# EAGLE board Shutdown_2019_v1.0 (EAGLE 9.1.2)

Size 88.9 x 76.2 mm. Coordinates in mm from the lower left corner, seen from the top.
Outline: 0,0 88.9,0 88.9,76.2 0,76.2 0,0
Copper layers (1*16): Top 0.035mm / dielectric 1.6mm / Bottom 0.035mm
Design rules "Elecrow_2-layer_PCB_eagle_rule": minimum track width 6mil, minimum drill 12mil, track to track 6mil, track to pad 6mil, pad to pad 6mil, via to via 8mil, smd to smd 0mil, copper to edge 20mil, drill to drill 10mil, minimum pad ring 6mil, minimum via ring 6mil, stop-mask expansion 0mil, vias tented up to drill 100mil, thermal gap 10mil
Net classes: 0 default: width 0.254 mm; 1 PWR: width 0.406 mm; 2 AIR: width 1.27 mm; 3 PWR_IN: width 0.914 mm

## Footprints (pad centres in the part's own frame; a part is rotated, then mirrored left to right if it is on the bottom)
PV36 = drill 0.6: A -2.54,0; B 2.54,0; W 0,0
TP09R = smd 0.9 x 0.9: TP 0,0
C0603 = smd 1.1 x 1: 1 -0.85,0; 2 0.85,0
C0805 = smd 1.3 x 1.5: 1 -0.95,0; 2 0.95,0
E2,5-7 = drill 0.813 pad 1.6: + -1.27,0 | drill 0.813 pad 1.6 octagon: - 1.27,0
MINIFIT_JR_5566-02 = drill 1.9: 1 0,2.25; 2 0,-2.25
LED-0603 = smd 1 x 1: A 0,-0.877; C 0,0.877
SOD323-F = smd 0.8 x 0.6: A 1.25,0; C -1.25,0
SOT23 = smd 1 x 1.4: 1 -0.95,-1.1; 2 0.95,-1.1; 3 0,1.1
3568 = drill 1.6 long: P$1 -4.96,1.7; P$2 4.96,1.7; P$3 4.96,-1.7; P$4 -4.96,-1.7
3,0-PAD = drill 3 pad 5.842: B3,0 0,0
MINIFIT_JR_5566-04 = drill 1.9: 1 -2.1,2.25; 2 2.1,2.25; 3 -2.1,-2.25; 4 2.1,-2.25
1X05 = drill 1.016 long: 1 -5.08,0; 2 -2.54,0; 3 0,0; 4 2.54,0; 5 5.08,0
INDUCTOR_5X5MM_NR5040_NOTHERMALS = smd 1.8 x 4: P$1 -1.8,0; P$2 1.8,0
R0603 = smd 1 x 1.1: 1 -0.85,0; 2 0.85,0
QFP50P900X900X160-48N = smd 1.473 x 0.279: 1 -4.216,2.743; 2 -4.216,2.261; 3 -4.216,1.753; 4 -4.216,1.245; 5 -4.216,0.762; 6 -4.216,0.254; 7 -4.216,-0.254; 8 -4.216,-0.762; 9 -4.216,-1.245; 10 -4.216,-1.753; 11 -4.216,-2.261; 12 -4.216,-2.743; 25 4.216,-2.743; 26 4.216,-2.261; 27 4.216,-1.753; 28 4.216,-1.245; 29 4.216,-0.762; 30 4.216,-0.254; 31 4.216,0.254; 32 4.216,0.762; 33 4.216,1.245; 34 4.216,1.753; 35 4.216,2.261; 36 4.216,2.743 | smd 0.279 x 1.473: 13 -2.743,-4.216; 14 -2.261,-4.216; 15 -1.753,-4.216; 16 -1.245,-4.216; 17 -0.762,-4.216; 18 -0.254,-4.216; 19 0.254,-4.216; 20 0.762,-4.216; 21 1.245,-4.216; 22 1.753,-4.216; 23 2.261,-4.216; 24 2.743,-4.216; 37 2.743,4.216; 38 2.261,4.216; 39 1.753,4.216; 40 1.245,4.216; 41 0.762,4.216; 42 0.254,4.216; 43 -0.254,4.216; 44 -0.762,4.216; 45 -1.245,4.216; 46 -1.753,4.216; 47 -2.261,4.216; 48 -2.743,4.216
SOT23-3 = smd 0.8 x 0.9: 1 -0.95,-1; 2 0.95,-1; 3 0,1.1
SOT23-5 = smd 0.55 x 1.2: 1 -0.95,-1.3; 2 0,-1.3; 3 0.95,-1.3; 4 0.95,1.3; 5 -0.95,1.3
SOT223 = smd 1.219 x 2.235: 1 -2.311,-3.099; 2 0,-3.099; 3 2.311,-3.099 | smd 3.6 x 2.2: 4 0,3.099
SOIC8 = smd 0.6 x 1.5: 1 -1.905,-2.75; 2 -0.635,-2.75; 3 0.635,-2.75; 4 1.905,-2.75; 5 1.905,2.75; 6 0.635,2.75; 7 -0.635,2.75; 8 -1.905,2.75
SOT23-6 = smd 0.55 x 1.2: 1 -0.95,-1.3; 2 0,-1.3; 3 0.95,-1.3; 4 0.95,1.3; 5 0,1.3; 6 -0.95,1.3
DPDT_2.54 = drill 0.6: $P1 -6.35,2.54; $P3 -1.27,2.54; $P4 1.27,2.54; $P5 3.81,2.54; $P8 3.81,-2.54; $P9 1.27,-2.54; $P10 -1.27,-2.54; $P12 -6.35,-2.54
SOD-123 = smd 0.9 x 0.95: A 1.575,0; C -1.575,0

## Placement (x,y rotation side)
BRAKE  PV36  [PV36]  5.33,19.81 180 top
BTH1  TPTP09R  [TP09R]  1.02,13.72 270 top
C1  0.1u  [C0603]  8.89,36.58 270 top
C2  10uF  [C0805]  18.03,57.4 270 top
C3  3u  [C0603]  10.16,41.91 0 top
C4  3u  [C0603]  5.84,41.91 0 top
C5  0.1u  [C0603]  34.29,57.15 90 bottom
C6  0.1u  [C0603]  24.13,57.15 90 bottom
C7  0.1u  [C0603]  13.97,57.15 90 bottom
C8  10uF  [C0805]  28.19,57.4 270 top
C9  10uF  [C0805]  39.37,57.15 270 top
C10  220u  [E2,5-7]  73.66,60.96 90 top
C11  2.2u  [C0805]  63.5,52.07 0 top
C12  4.7u  [C0805]  68.58,45.72 90 top
C13  4.7u  [C0805]  78.74,45.72 90 top
C14  2.2u  [C0805]  68.58,52.07 180 top
C15  1u  [C0805]  60.2,29.97 90 bottom
C16  1u  [C0805]  28.96,29.46 180 bottom
C17  560p  [C0603]  72.39,2.54 90 top
C18  560p  [C0603]  72.39,10.16 270 top
C19  1u  [C0805]  62.23,29.97 270 bottom
C20  1u  [C0805]  28.96,31.5 0 bottom
C21  [C0603]  44.45,9.91 180 top
C22  0.1u  [C0805]  43.69,61.47 90 top
C23  0.1u  [C0805]  25.4,52.58 0 top
C24  0.1u  [C0603]  3.05,37.08 270 top
C25  0.01u  [C0603]  7.11,32.51 90 top
C26  0.1u  [C0805]  35.56,52.58 0 top
C27  0.1u  [C0603]  13.46,41.66 270 top
C28  0.1u  [C0603]  19.3,41.66 270 top
C29  0.1u  [C0805]  37.34,16 0 top
C30  0.1u  [C0805]  47.24,16 0 top
C31  0.001u  [C0805]  17.53,28.45 180 top
C32  0.1u  [C0805]  56.13,14.99 0 top
C33  0.001u  [C0805]  21.59,18.29 0 top
C34  0.001u  [C0805]  15.49,18.29 0 top
C35  0.001u  [C0805]  24.38,9.91 0 top
C36  0.001u  [C0805]  30.73,9.91 0 top
C37  0.1u  [C0603]  33.78,19.56 270 top
C38  0.1u  [C0603]  43.69,19.56 270 top
C39  0.1u  [C0603]  21.34,27.94 180 top
CAN  MINIFIT_JR_5566-02  [MINIFIT_JR_5566-02]  64.77,5.08 0 top
CURR  PV36  [PV36]  5.33,25.15 180 top
CURRENT_SENSOR_SUPPLY  MINIFIT_JR_5566-02  [MINIFIT_JR_5566-02]  83.82,32.51 90 top
D1  BLUE  [LED-0603]  35.56,55.88 270 top
D2  1N914  [SOD323-F]  20.57,62.23 270 bottom
D4  BLUE  [LED-0603]  25.4,56.64 270 top
D7  BLUE  [LED-0603]  15.24,56.64 270 top
D8  PESD1  [SOT23]  73.66,6.35 270 top
D9  1N914  [SOD323-F]  30.73,62.48 270 bottom
D10  RED  [LED-0603]  56.9,36.32 180 top
D11  GREEN  [LED-0603]  63.5,54.1 270 top
D12  GREEN  [LED-0603]  68.58,54.1 90 top
D13  RED  [LED-0603]  28.45,14.48 180 top
D15  1N914  [SOD323-F]  40.89,62.23 270 bottom
FUSE  MINI297-3568  [3568]  85.09,48.26 270 top
H1  MOUNT-PAD-ROUND3.0  [3,0-PAD]  83.82,71.12 0 top
H2  MOUNT-PAD-ROUND3.0  [3,0-PAD]  83.82,5.08 0 top
H3  MOUNT-PAD-ROUND3.0  [3,0-PAD]  5.08,5.08 0 top
H4  MOUNT-PAD-ROUND3.0  [3,0-PAD]  5.08,71.12 0 top
HALL_SENSE  MINIFIT_JR_5566-04  [MINIFIT_JR_5566-04]  15.24,5.08 0 top
JP1  [1X05]  69.85,31.75 270 top
JP2  [1X05]  33.02,38.35 0 top
L4  10u  [INDUCTOR_5X5MM_NR5040_NOTHERMALS]  74.68,53.85 180 top
PWR  MINIFIT_JR_5566-02  [MINIFIT_JR_5566-02]  83.82,62.23 90 top
Q1  DMN6140L-7  [SOT23]  19.3,53.34 180 bottom
Q2  DMN6140L-7  [SOT23]  29.46,53.34 180 bottom
Q3  DMN6140L-7  [SOT23]  25.4,53.34 90 bottom
Q4  DMN6140L-7  [SOT23]  86.36,15.24 0 top
Q5  DMN6140L-7  [SOT23]  15.24,53.34 90 bottom
Q6  DMP3099L-7  [SOT23]  16.51,62.23 180 bottom
Q7  DMN6140L-7  [SOT23]  56.13,18.29 0 top
Q9  DMN6140L-7  [SOT23]  39.62,53.34 180 bottom
Q10  DMN6140L-7  [SOT23]  52.58,63.75 0 top
Q11  DMP3099L-7  [SOT23]  26.67,62.23 180 bottom
Q12  IRLML6346PBF  [SOT23]  13.21,53.09 90 top
Q13  IRLML6346PBF  [SOT23]  13.21,49.02 90 top
Q14  IRLML6346PBF  [SOT23]  18.29,53.09 90 top
Q15  DMP3099L-7  [SOT23]  36.83,62.23 180 bottom
Q16  DMN6140L-7  [SOT23]  35.56,53.34 90 bottom
Q17  IRLML6346PBF  [SOT23]  18.29,49.02 90 top
Q18  DMN6140L-7  [SOT23]  64.26,72.39 90 top
Q20  DMN6140L-7  [SOT23]  59.94,72.39 90 top
Q21  DMN6140L-7  [SOT23]  68.58,72.39 90 top
R1  100k  [R0603]  10.16,39.88 180 top
R2  [R0603]  63.5,56.13 180 top
R3  3.6k  [R0603]  76.2,19.05 0 top
R4  [R0603]  68.58,56.13 180 top
R5  10k  [R0603]  17.78,45.97 0 top
R6  3.6k  [R0603]  76.2,25.4 0 top
R7  50k  [R0603]  41.15,7.11 90 top
R8  10k  [R0603]  3.05,33.53 90 top
R9  1k  [R0603]  81.28,16.51 0 top
R11  1k  [R0603]  21.59,37.85 90 top
R12  10k  [R0603]  19.81,50.29 0 bottom
R13  10k  [R0603]  29.97,50.29 180 bottom
R14  10k  [R0603]  40.13,50.29 180 bottom
R15  900  [R0603]  15.24,58.42 180 top
R16  10k  [R0603]  16.51,57.15 270 bottom
R17  10k  [R0603]  26.67,57.15 270 bottom
R18  10k  [R0603]  36.83,57.15 270 bottom
R19  100  [R0603]  69.85,2.54 90 top
R20  100  [R0603]  69.85,10.16 270 top
R21  900  [R0603]  35.56,58.42 180 top
R22  900  [R0603]  25.4,58.42 180 top
R23  10k  [R0603]  55.88,64.01 270 top
R24  120  [R0603]  69.85,6.35 270 top
R25  1k  [R0603]  44.2,58.42 0 top
R26  10k  [R0603]  72.64,35.56 270 top
R27  10k  [R0603]  54.86,36.32 90 top
R28  10k  [R0603]  29.21,41.4 0 top
R29  10k  [R0603]  26.67,14.48 270 top
R30  10k  [R0603]  60.2,69.34 0 top
R31  10k  [R0603]  64.52,69.34 0 top
R32  10k  [R0603]  68.83,69.34 0 top
R33  100  [R0603]  46.48,62.48 180 top
R34  100k  [R0603]  46.48,60.45 180 top
R35  1k  [R0603]  21.34,29.97 0 top
R36  100k  [R0603]  5.84,39.88 180 top
R37  100  [R0603]  26.42,49.78 90 top
R38  100k  [R0603]  24.38,49.78 90 top
R39  10k  [R0603]  16,37.85 90 top
R40  1k  [R0603]  23.62,37.85 90 top
R41  100  [R0603]  36.58,49.78 90 top
R42  100k  [R0603]  34.54,49.78 90 top
R43  10k  [R0603]  18.03,37.85 90 top
R44  1k  [R0603]  5.08,32.51 270 top
R45  10k  [R0603]  47.75,7.11 90 top
R46  10k  [R0603]  49.78,20.57 180 top
R47  10k  [R0603]  39.12,3.3 90 top
R48  10k  [R0603]  37.08,3.3 90 top
R49  10  [R0603]  38.35,12.95 90 top
R50  100k  [R0603]  36.32,12.95 90 top
R51  10  [R0603]  48.26,12.95 90 top
R52  100k  [R0603]  46.23,12.95 90 top
R53  10  [R0603]  16.51,31.5 270 top
R54  10k  [R0603]  18.54,31.5 270 top
R55  100  [R0603]  57.15,12.45 90 top
R56  100k  [R0603]  55.12,12.45 90 top
R57  10  [R0603]  20.83,12.19 90 top
R58  10k  [R0603]  20.83,15.49 90 top
R59  10  [R0603]  14.48,12.19 90 top
R60  10k  [R0603]  14.48,15.49 90 top
R61  10  [R0603]  23.62,3.81 90 top
R62  10k  [R0603]  23.62,7.11 90 top
R63  10  [R0603]  29.97,3.81 90 top
R64  10k  [R0603]  29.97,7.11 90 top
R65  1k  [R0603]  18.8,12.19 270 top
R66  1k  [R0603]  12.45,12.19 270 top
R67  1k  [R0603]  21.59,3.81 270 top
R68  1k  [R0603]  27.94,3.81 270 top
R69  10k  [R0603]  39.88,20.57 180 top
R70  10k  [R0603]  14.99,23.88 0 top
R71  15k  [R0603]  14.99,25.91 0 top
R72  15k  [R0603]  49.78,18.54 180 top
R73  15k  [R0603]  39.88,18.54 180 top
R74  10k  [R0603]  53.09,18.8 90 top
TSAL  MINIFIT_JR_5566-04  [MINIFIT_JR_5566-04]  83.82,22.86 90 top
TTH1  TPTP09R  [TP09R]  1.02,16 270 top
U1  STM32F103CBT6  [QFP50P900X900X160-48N]  61.21,29.97 0 top
U2  STM32F103CBT6  [QFP50P900X900X160-48N]  28.96,30.48 90 top
U$1  MINIFIT_JR_5566-02  [MINIFIT_JR_5566-02]  5.08,62.23 270 top
U$2  MINIFIT_JR_5566-04  [MINIFIT_JR_5566-04]  5.08,52.07 270 top
U$3  MINIFIT_JR_5566-04  [MINIFIT_JR_5566-04]  55.12,5.08 0 top
U$4  DNBT8105  [SOT23-3]  81.28,13.97 270 top
U$5  TS881  [SOT23-5]  11.68,36.58 0 top
U$6  MINIFIT_JR_5566-02  [MINIFIT_JR_5566-02]  74.93,71.12 180 top
U$7  DNBT8105  [SOT23-3]  76.2,22.86 270 top
U$8  DNBT8105  [SOT23-3]  76.2,16.51 270 top
U$9  SPX1117M3-L-3-3  [SOT223]  63.5,45.72 0 top
U$10  SPX1117M3-L-5-0  [SOT223]  73.66,45.72 0 top
U$11  MCP2562  [SOIC8]  64.77,15.24 180 top
U$12  MCP4018  [SOT23-6]  37.85,7.11 270 top
U$13  EC2  [DPDT_2.54]  16.51,67.31 90 top
U$14  EC2  [DPDT_2.54]  26.67,67.31 90 top
U$15  EC2  [DPDT_2.54]  36.83,67.31 90 top
U$16  TS881  [SOT23-5]  22.1,41.66 0 top
U$17  TS881  [SOT23-5]  16.26,41.66 0 top
U$18  LMV321L  [SOT23-5]  44.45,7.11 270 top
U$19  MINIFIT_JR_5566-04  [MINIFIT_JR_5566-04]  51.31,71.12 180 top
U$20  TS881  [SOT23-5]  5.84,36.58 0 top
U$21  BZT52C13  [SOD-123]  59.18,15.49 90 top
U$22  LMV321L  [SOT23-5]  36.58,19.56 0 top
U$23  LMV321L  [SOT23-5]  46.48,19.56 0 top
U$24  LMV321L  [SOT23-5]  18.29,24.89 180 top
U$25  BZT52C13  [SOD-123]  44.7,64.52 180 top
U$26  BZT52C13  [SOD-123]  28.45,51.56 90 top
U$29  BZT52C13  [SOD-123]  38.61,51.56 90 top
U$32  BZT52C5V6  [SOD-123]  40.39,15.24 90 top
U$33  BZT52C5V6  [SOD-123]  50.29,15.24 90 top
U$34  BZT52C5V6  [SOD-123]  14.48,29.21 270 top
U$36  BZT52C5V6  [SOD-123]  22.86,14.99 90 top
U$37  BZT52C5V6  [SOD-123]  16.51,14.99 90 top
U$38  BZT52C5V6  [SOD-123]  25.65,6.6 90 top
U$39  BZT52C5V6  [SOD-123]  32,6.6 90 top

## Library data of the parts
BRAKE CURR = BOURNS
BTH1 TTH1 = testpad
C1 C3-C7 C24 C25 C27 C28 C37-C39 R1 R5 R8 R11-R18 R21-R23 R25 R36 R39 R40 R43 R44 = resistor
C2 C8-C23 C26 C29-C36 = rcl; SPICEPREFIX: C
CAN CURRENT_SENSOR_SUPPLY HALL_SENSE PWR TSAL U$1-U$3 U$6 U$19 = Display_Custom
D1 D4 D7 = SparkFun-LED; PROD_ID: DIO-08575
D2 D9 D15 = Diodes
D8 = diode
D10 D13 = SparkFun-LED; PROD_ID: DIO-00819
D11 D12 = SparkFun-LED; PROD_ID: DIO-00821
FUSE = Fuse
H1-H4 = holes
JP1 JP2 = Headers_IFE
L4 = microbuilder
Q1-Q7 Q9-Q18 Q20 Q21 = TRANS
R2-R4 R6 R7 R9 R19 R20 R24 R26-R35 R37 R38 R41 R42 R45-R74 = rcl; SPICEPREFIX: R
U1 U2 = ST Microelctronics_By_element14_Batch_1; MPN: STM32F103CBT6; OC_FARNELL: 1606327; OC_NEWARK: 11N8296; PACKAGE: QFP-48; SUPPLIER: STMICROELECTRONICS
U$4 U$7 U$8 U$21 U$25 U$26 U$29 U$32-U$34 U$36-U$39 = DIODES_INC
U$5 U$16-U$18 U$20 U$22-U$24 = STM
U$9 U$10 = MAXLINEAR
U$11 U$12 = MICROCHIP
U$13-U$15 = KEMET

## Nets
!RST: JP1.2 R26.2 U1.7
!RST_TC: JP2.2 R28.2 U2.7
+3V3 [PWR]: C11.1 C15.1 C16.1 C19.1 C20.1 D11.A JP1.1 JP2.1 R12.2 R13.2 R14.2 R23.2 R26.1 R27.1 R28.1 R29.1 R74.2 U1.9 U1.24 U1.36 U1.48 U2.9 U2.24 U2.36 U2.48 U$9.2 U$9.4 U$11.5
+5V [PWR]: BRAKE.A C1.1 C14.1 C21.1 C24.1 C27.1 C28.1 C37.1 C38.1 C39.1 CURR.A CURRENT_SENSOR_SUPPLY.1 D12.A R8.2 R11.2 R35.2 R39.2 R45.2 R47.1 R48.1 R65.2 R66.2 R67.2 R68.2 U$5.5 U$10.2 U$10.4 U$11.3 U$12.1 U$16.5 U$17.5 U$18.5 U$19.1 U$20.5 U$22.5 U$23.5 U$24.5
+12V [PWR_IN]: C10.+ C12.1 C13.1 L4.P$2 Q6.2 Q11.2 Q15.2 R5.2 R25.2 U$9.3 U$10.3 U$13.$P5 U$14.$P5 U$15.$P5
AIR_IN: U$1.1 U$13.$P9
AIR_OUT: U$1.2 U$15.$P8
APPS_EN: Q20.1 R30.2 U1.40
BRAKE_LIGHT-: TSAL.1 U$4.3
BRAKE_LIGHT_EN: R9.1 U1.26
BRAKE_PRESSURE: R53.1 U$2.4
BRAKE_PRESSURE_F: R70.2 U$5.3 U$24.3 U$24.4
BRAKE_PRESSURE_F_3_3: R70.1 R71.2 U1.10
BRAKE_TH: BRAKE.W BTH1.TP U$5.4
BSPD_BRAKE_COND: C3.1 Q13.1 R1.1
BSPD_CURR_COND: C4.1 Q12.1 R36.1
BSPD_OC: Q17.1 U$17.1
BSPD_SC: Q14.1 U$16.1
BTSF_EN: Q18.1 R31.2 U1.41
CAN_RX: U1.32 U$11.4
CAN_STBY: U1.31 U$11.8
CAN_TX: U1.33 U$11.1
CANH: CAN.1 D8.1 R20.2 R24.2 U$11.7
CANL: CAN.2 D8.2 R19.2 R24.1 U$11.6
CURR_TH: CURR.W TTH1.TP U$20.4
CURRENT_SENSE: R8.1 R44.2 U$2.2
CURRENT_SENSE_F: C25.1 R44.1 U$16.4 U$17.3 U$20.3
DEBUG: D10.C U1.2
DEBUG_TC: D13.C U2.2
ENABLE_IN: Q21.2 U$6.1
ENABLE_OUT: Q20.3 U$6.2
FAULT_BMS: R37.1 U$2.1
FAULT_BMS_F: C6.1 C23.1 Q3.1 R17.2 R38.2
FAULT_BMS_STAT: C8.1 D9.C Q2.1 R22.1 U$14.$P1 U$14.$P4
FAULT_BMS_STATUS_3_3: Q2.3 R13.1 U1.12
FAULT_BSPD: C7.1 Q5.1 Q12.3 Q14.3 Q17.3 R5.1 R16.2
FAULT_BSPD_STAT: C2.1 D2.C Q1.1 R15.1 U$13.$P1 U$13.$P4
FAULT_BSPD_STATUS_3_3: Q1.3 R12.1 U1.27
FAULT_IMD: R41.1 U$2.3
FAULT_IMD_F: C5.1 C26.1 Q16.1 R18.2 R42.2
FAULT_IMD_STAT: C9.1 D15.C Q9.1 R21.1 U$15.$P1 U$15.$P4
FAULT_IMD_STATUS_3_3: Q9.3 R14.1 U1.13
FAULT_RESET: R33.1 U$19.4
FAULT_RESET_F: C22.1 Q6.1 Q11.1 Q15.1 R25.1 R34.2
GND: BRAKE.B C1.2 C2.2 C3.2 C4.2 C5.2 C6.2 C7.2 C8.2 C9.2 C10.- C11.2 C12.2 C13.2 C14.2 C15.2 C16.2 C17.2 C18.2 C19.2 C20.2 C21.2 C22.2 C23.2 C24.2 C25.2 C26.2 C27.2 C28.2 C29.2 C30.2 C31.2 C32.2 C33.2 C34.2 C35.2 C36.2 C37.2 C38.2 C39.2 CURR.B CURRENT_SENSOR_SUPPLY.2 D1.C D4.C D7.C D8.3 H1.B3,0 H2.B3,0 H3.B3,0 H4.B3,0 JP1.5 JP2.5 PWR.2 Q1.2 Q2.2 Q3.2 Q4.2 Q5.2 Q7.2 Q9.2 Q10.2 Q13.2 Q14.2 Q16.2 Q17.2 R2.1 R4.1 R7.1 R16.1 R17.1 R18.1 R30.1 R31.1 R32.1 R40.1 R43.1 R71.1 R72.1 R73.1 U1.8 U1.20 U1.23 U1.35 U1.44 U1.47 U2.8 U2.20 U2.23 U2.35 U2.44 U2.47 U$4.2 U$5.2 U$7.2 U$8.2 U$9.1 U$10.1 U$11.2 U$12.2 U$16.2 U$17.2 U$18.2 U$19.3 U$20.2 U$21.A U$22.2 U$23.2 U$24.2 U$25.A U$26.A U$29.A U$32.A U$33.A U$34.A U$36.A U$37.A U$38.A U$39.A
HALL_FL: HALL_SENSE.1 R57.1
HALL_FL_F: C33.1 R58.2 U2.25
HALL_FR: HALL_SENSE.3 R59.1
HALL_FR_F: C34.1 R60.2 U2.26
HALL_RL: HALL_SENSE.2 R61.1
HALL_RL_F: C35.1 R62.2 U2.27
HALL_RR: HALL_SENSE.4 R63.1
HALL_RR_F: C36.1 R64.2 U2.28
HV_CONNECTED: Q10.1 U$19.2
HV_CONNECTED_3_3: Q10.3 R23.1 U1.21
N$1: D9.A Q3.3 U$14.$P12
N$2: R55.2 R56.1 U$21.C
N$3: R9.2 U$4.1
N$6 [PWR_IN]: FUSE.P$2 FUSE.P$3 L4.P$1
N$8: D7.A R15.2
N$9: Q12.2 Q13.3
N$10: D12.C R4.2
N$11: D11.C R2.2
N$12: R7.2 U$12.5 U$18.1
N$13: R36.2 U$20.1
N$14: C17.1 R19.1
N$15: R3.2 U$8.1
N$16: R6.2 U$7.1
N$17: C18.1 R20.1
N$18: R1.2 U$5.1
N$19: D10.A R27.2
N$20: R49.2 R50.1 U$32.C
N$21: D13.A R29.2
N$24: Q18.3 Q20.2
N$25: Q18.2 Q21.3
N$27: U$13.$P8 U$14.$P9
N$28: Q6.3 U$13.$P3
N$29: R33.2 R34.1 U$25.C
N$31: U$14.$P8 U$15.$P9
N$32: D2.A Q5.3 U$13.$P12
N$34: D4.A R22.2
N$35: Q11.3 U$14.$P3
N$37: R37.2 R38.1 U$26.C
N$38: C29.1 R50.2 U$22.1
N$42: D1.A R21.2
N$43: Q15.3 U$15.$P3
N$44: D15.A Q16.3 U$15.$P12
N$49: R41.2 R42.1 U$29.C
N$52: R51.2 R52.1 U$33.C
N$53: C30.1 R52.2 U$23.1
N$59: R35.1 R53.2 R54.1 U$34.C
N$60: C31.1 R54.2 U$24.1
N$65: R57.2 R58.1 R65.1 U$36.C
N$68: R59.2 R60.1 R66.1 U$37.C
N$71: R61.2 R62.1 R67.1 U$38.C
N$74: R63.2 R64.1 R68.1 U$39.C
OC_TH: R11.1 R43.2 U$17.4
PA11: U2.32
PRECHARGE_COMP_F: C32.1 Q7.1 R56.2
PRECHARGE_COMPLETE: R55.1 U$3.3
PRECHARGE_COMPLETE_3_3: Q7.3 R74.1 U1.42
PWR [PWR_IN]: FUSE.P$1 FUSE.P$4 PWR.1
RTD_EN: Q21.1 R32.2 U1.45
RTDS-: Q4.3 TSAL.3
RTDS_EN: Q4.1 U1.39
SC_TH: R39.1 R40.2 U$16.3
SCL_TC: R48.2 U2.42 U$12.3
SDA_TC: R47.2 U2.43 U$12.4
SPI1_MISO: U1.16 U2.17
SPI1_MOSI: U1.17 U2.16
SPI1_NSS: U1.14 U2.14
SPI1_SCK: U1.15 U2.15
SWCLK: JP1.4 U1.37
SWCLK_TC: JP2.4 U2.37
SWDIO: JP1.3 U1.34
SWDIO_TC: JP2.3 U2.34
THROTTLE_A: R49.1 U$3.1
THROTTLE_A_F: R69.2 U$12.6 U$22.3 U$22.4
THROTTLE_A_F_3_3: R69.1 R73.2 U1.18
THROTTLE_B: R51.1 U$3.2
THROTTLE_B_F: R46.2 U$23.3 U$23.4
THROTTLE_B_F_3_3: R46.1 R72.2 U1.19
THROTTLE_OUT: R45.1 U$3.4 U$18.3 U$18.4
TSAL_HV-: TSAL.4 U$8.3
TSAL_HV_EN: R3.1 U1.22
TSAL_LV-: TSAL.2 U$7.3
TSAL_LV_EN: R6.1 U1.25

## Tracks (layer width: path | path; a pad name or v marks a point on that pad's centre or on a via)
!RST  (2 unrouted)
!RST_TC  (2 unrouted)
+3V3  (27 unrouted)
+5V  (36 unrouted)
+12V  (13 unrouted)
AIR_IN  (1 unrouted)
AIR_OUT  (1 unrouted)
APPS_EN  (2 unrouted)
BRAKE_LIGHT-  (1 unrouted)
BRAKE_LIGHT_EN  (1 unrouted)
BRAKE_PRESSURE  (1 unrouted)
BRAKE_PRESSURE_F  (3 unrouted)
BRAKE_PRESSURE_F_3_3  (2 unrouted)
BRAKE_TH  (2 unrouted)
BSPD_BRAKE_COND  (2 unrouted)
BSPD_CURR_COND  (2 unrouted)
BSPD_OC  (1 unrouted)
BSPD_SC  (1 unrouted)
BTSF_EN  (2 unrouted)
CAN_RX  (1 unrouted)
CAN_STBY  (1 unrouted)
CAN_TX  (1 unrouted)
CANH  (4 unrouted)
CANL  (4 unrouted)
CURR_TH  (2 unrouted)
CURRENT_SENSE  (2 unrouted)
CURRENT_SENSE_F  (4 unrouted)
DEBUG  (1 unrouted)
DEBUG_TC  (1 unrouted)
ENABLE_IN  (1 unrouted)
ENABLE_OUT  (1 unrouted)
FAULT_BMS  (1 unrouted)
FAULT_BMS_F  (4 unrouted)
FAULT_BMS_STAT  (5 unrouted)
FAULT_BMS_STATUS_3_3  (2 unrouted)
FAULT_BSPD  (6 unrouted)
FAULT_BSPD_STAT  (5 unrouted)
FAULT_BSPD_STATUS_3_3  (2 unrouted)
FAULT_IMD  (1 unrouted)
FAULT_IMD_F  (4 unrouted)
FAULT_IMD_STAT  (5 unrouted)
FAULT_IMD_STATUS_3_3  (2 unrouted)
FAULT_RESET  (1 unrouted)
FAULT_RESET_F  (5 unrouted)
GND  (117 unrouted)
HALL_FL  (1 unrouted)
HALL_FL_F  (2 unrouted)
HALL_FR  (1 unrouted)
HALL_FR_F  (2 unrouted)
HALL_RL  (1 unrouted)
HALL_RL_F  (2 unrouted)
HALL_RR  (1 unrouted)
HALL_RR_F  (2 unrouted)
HV_CONNECTED  (1 unrouted)
HV_CONNECTED_3_3  (2 unrouted)
N$1  (2 unrouted)
N$2  (2 unrouted)
N$3  (1 unrouted)
N$6  (2 unrouted)
N$8  (1 unrouted)
N$9  (1 unrouted)
N$10  (1 unrouted)
N$11  (1 unrouted)
N$12  (2 unrouted)
N$13  (1 unrouted)
N$14  (1 unrouted)
N$15  (1 unrouted)
N$16  (1 unrouted)
N$17  (1 unrouted)
N$18  (1 unrouted)
N$19  (1 unrouted)
N$20  (2 unrouted)
N$21  (1 unrouted)
N$24  (1 unrouted)
N$25  (1 unrouted)
N$27  (1 unrouted)
N$28  (1 unrouted)
N$29  (2 unrouted)
N$31  (1 unrouted)
N$32  (2 unrouted)
N$34  (1 unrouted)
N$35  (1 unrouted)
N$37  (2 unrouted)
N$38  (2 unrouted)
N$42  (1 unrouted)
N$43  (1 unrouted)
N$44  (2 unrouted)
N$49  (2 unrouted)
N$52  (2 unrouted)
N$53  (2 unrouted)
N$59  (3 unrouted)
N$60  (2 unrouted)
N$65  (3 unrouted)
N$68  (3 unrouted)
N$71  (3 unrouted)
N$74  (3 unrouted)
OC_TH  (2 unrouted)
PRECHARGE_COMP_F  (2 unrouted)
PRECHARGE_COMPLETE  (1 unrouted)
PRECHARGE_COMPLETE_3_3  (2 unrouted)
PWR  (2 unrouted)
RTD_EN  (2 unrouted)
RTDS-  (1 unrouted)
RTDS_EN  (1 unrouted)
SC_TH  (2 unrouted)
SCL_TC  (2 unrouted)
SDA_TC  (2 unrouted)
SPI1_MISO  (1 unrouted)
SPI1_MOSI  (1 unrouted)
SPI1_NSS  (1 unrouted)
SPI1_SCK  (1 unrouted)
SWCLK  (1 unrouted)
SWCLK_TC  (1 unrouted)
SWDIO  (1 unrouted)
SWDIO_TC  (1 unrouted)
THROTTLE_A  (1 unrouted)
THROTTLE_A_F  (3 unrouted)
THROTTLE_A_F_3_3  (2 unrouted)
THROTTLE_B  (1 unrouted)
THROTTLE_B_F  (2 unrouted)
THROTTLE_B_F_3_3  (2 unrouted)
THROTTLE_OUT  (3 unrouted)
TSAL_HV-  (1 unrouted)
TSAL_HV_EN  (1 unrouted)
TSAL_LV-  (1 unrouted)
TSAL_LV_EN  (1 unrouted)